# EAGLE board dr-who (EAGLE 9.6.2)
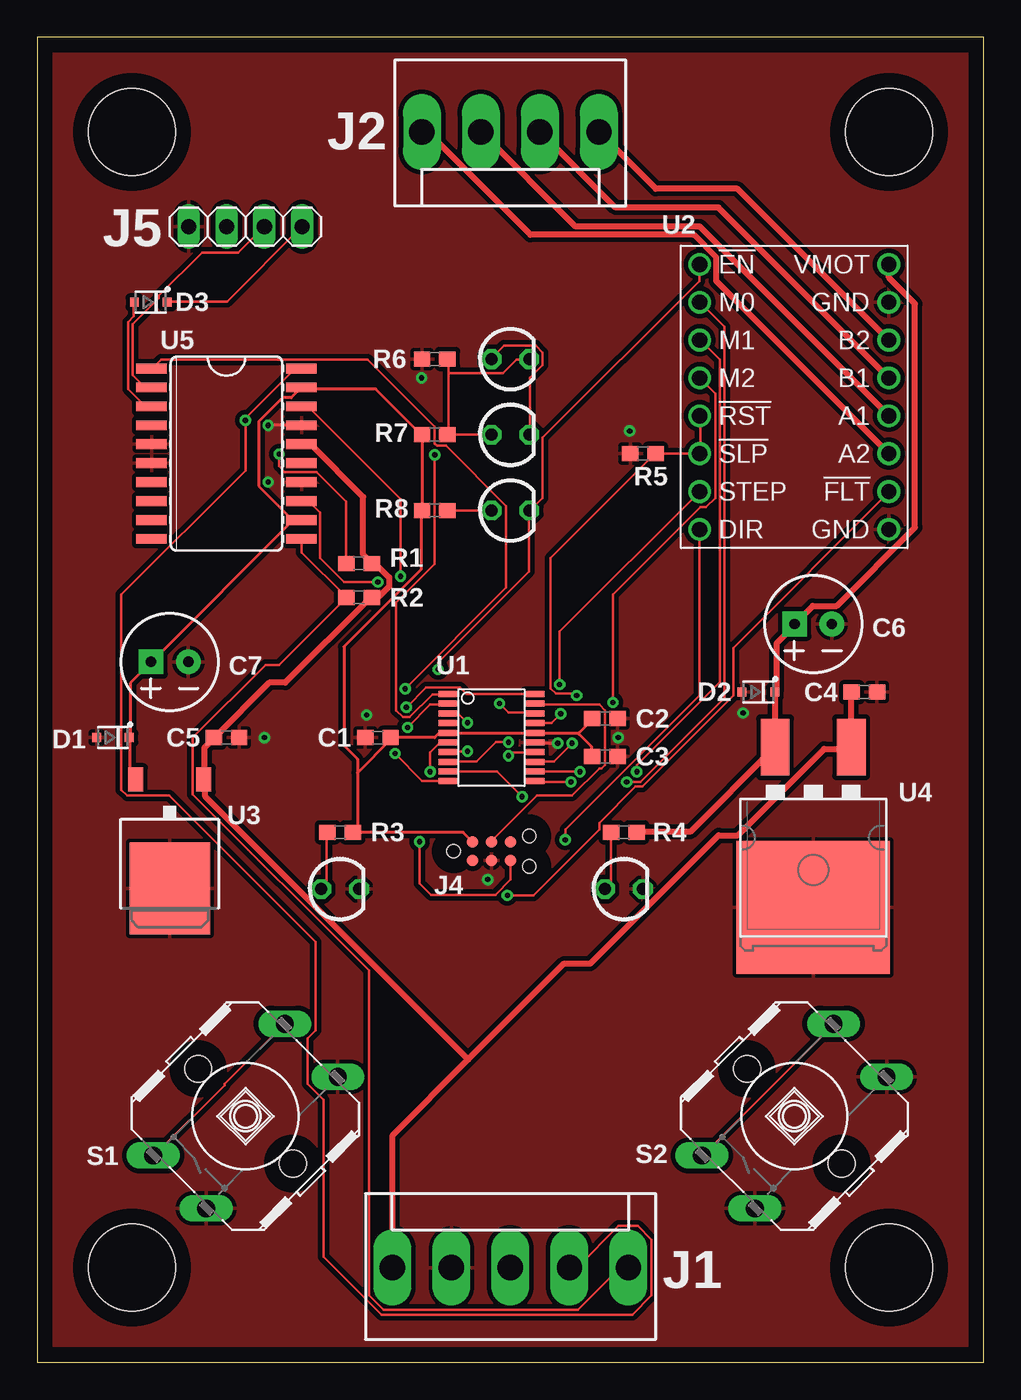
[diagram p0: board, top side]
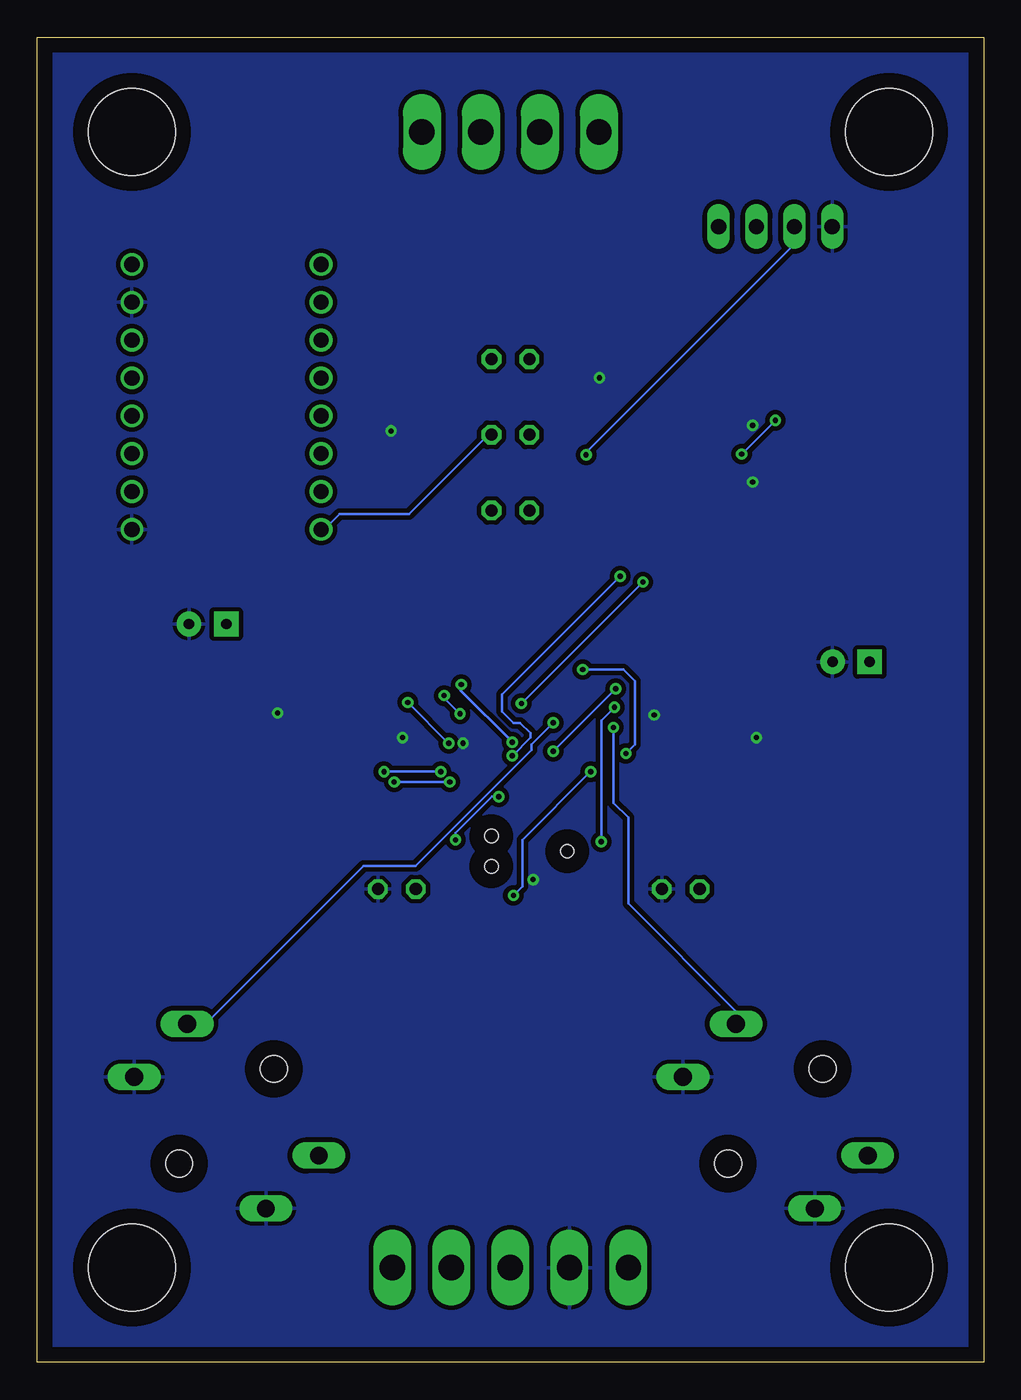
[diagram p1: board, bottom side, seen from below]

Size 63.5 x 88.9 mm. Coordinates in mm from the lower left corner, seen from the top.
Outline: 0,0 63.5,0 63.5,88.9 0,88.9 0,0
Copper layers (1*16): Top 0.035mm / dielectric 1.5mm / Bottom 0.035mm
Design rules "default *": minimum track width 6mil, minimum drill 0.35mm, track to track 6mil, track to pad 6mil, pad to pad 6mil, via to via 6mil, smd to smd 6mil, copper to edge 40mil, drill to drill 6mil, minimum pad ring 10mil, minimum via ring 8mil, stop-mask expansion 4mil, vias tented up to drill 14mil, thermal gap 10mil
Net classes: 0 default: width 0.102 mm; 1 fat: width 0.406 mm; 2 medium: width 0.203 mm
Holes 5.84 mm at 6.35,6.35 57.15,6.35 57.15,82.55 6.35,82.55

## Footprints (pad centres in the part's own frame; a part is rotated, then mirrored left to right if it is on the bottom)
0603 = smd 1.1 x 1: 1 -0.85,0; 2 0.85,0
CPOL-RADIAL-2.5MM-6.5MM = drill 0.7 pad 1.651 square: 1 1.25,0 | drill 0.7 pad 1.651: 2 -1.25,0
SOD323-R = smd 0.6 x 0.6: A 1.1,0; C -1.1,0
KK-156-5 = drill 1.7 pad 2.184 long: 1 7.92,0; 2 3.96,0; 3 0,0; 4 -3.96,0; 5 -7.92,0
KK-156-4 = drill 1.7 pad 2.184 long: 1 5.94,0; 2 1.98,0; 3 -1.98,0; 4 -5.94,0
TC2030-MCP-NL = smd 0.787 x 0.787: 1 1.27,-0.635; 2 1.27,0.635; 3 2.54,-0.635; 4 2.54,0.635; 5 3.81,-0.635; 6 3.81,0.635 | hole 0.889: 0,0; 5.08,-1.016; 5.08,1.016
1X04 = drill 1.016 long: 1 -3.81,0; 2 -1.27,0; 3 1.27,0; 4 3.81,0
LED3MM = drill 0.813 octagon: A -1.27,0; K 1.27,0
B3F/40XX = drill 1.194 long: 1 -6.198,-2.642; 2 2.642,6.198; 3 -2.642,-6.198; 4 6.198,2.642 | hole 1.803: -3.175,3.175; 3.175,-3.175
TSSOP20-I = smd 0.4 x 1.35: 1 -2.925,-2.875; 2 -2.275,-2.875; 3 -1.625,-2.875; 4 -0.975,-2.875; 5 -0.325,-2.875; 6 0.325,-2.875; 7 0.975,-2.875; 8 1.625,-2.875; 9 2.275,-2.875; 10 2.925,-2.875; 11 2.925,2.875; 12 2.275,2.875; 13 1.625,2.875; 14 0.975,2.875; 15 0.325,2.875; 16 -0.325,2.875; 17 -0.975,2.875; 18 -1.625,2.875; 19 -2.275,2.875; 20 -2.925,2.875
DRV8825 = drill 1.016: 1 -6.35,8.89; 2 -6.35,6.35; 3 -6.35,3.81; 4 -6.35,1.27; 5 -6.35,-1.27; 6 -6.35,-3.81; 7 -6.35,-6.35; 8 -6.35,-8.89; 9 6.35,-8.89; 10 6.35,-6.35; 11 6.35,-3.81; 12 6.35,-1.27; 13 6.35,1.27; 14 6.35,3.81; 15 6.35,6.35; 16 6.35,8.89
TO252 = smd 1 x 1.6: 1 -2.28,-4.8; 3 2.28,-4.8 | smd 5.4 x 6.2: 2 0,2.5
D2PAK = smd 1.93 x 3.81: 1 -2.55,-8.25; 3 2.55,-8.25 | smd 10.3 x 8.9: 2 0,2.5
SO20L = smd 0.66 x 2.032: 1 -5.715,-5.029; 2 -4.445,-5.029; 3 -3.175,-5.029; 4 -1.905,-5.029; 5 -0.635,-5.029; 6 0.635,-5.029; 7 1.905,-5.029; 8 3.175,-5.029; 9 4.445,-5.029; 10 5.715,-5.029; 11 5.715,5.029; 12 4.445,5.029; 13 3.175,5.029; 14 1.905,5.029; 15 0.635,5.029; 16 -0.635,5.029; 17 -1.905,5.029; 18 -3.175,5.029; 19 -4.445,5.029; 20 -5.715,5.029

## Placement (x,y rotation side)
C1  4.7uF  [0603]  22.86,41.91 180 top
C2  0.1uF  [0603]  38.1,43.18 0 top
C3  0.1uF  [0603]  38.1,40.64 0 top
C4  0.47uF  [0603]  55.5,44.96 0 top
C5  0.47uF  [0603]  12.7,41.91 0 top
C6  100uF  [CPOL-RADIAL-2.5MM-6.5MM]  52.07,49.53 180 top
C7  100uF  [CPOL-RADIAL-2.5MM-6.5MM]  8.89,46.99 180 top
D1  [SOD323-R]  5.08,41.91 180 top
D2  [SOD323-R]  48.39,44.96 180 top
D3  [SOD323-R]  7.62,71.12 180 top
J1  [KK-156-5]  31.75,6.35 0 top
J2  [KK-156-4]  31.75,82.55 180 top
J4  [TC2030-MCP-NL]  27.94,34.29 0 top
J5  [1X04]  13.97,76.2 0 top
LED1  3.3V  [LED3MM]  20.32,31.75 0 top
LED2  12V  [LED3MM]  39.37,31.75 0 top
LED3  D+  [LED3MM]  31.75,67.31 0 top
LED4  D-  [LED3MM]  31.75,62.23 0 top
LED5  EN  [LED3MM]  31.75,57.15 0 top
R1  10k  [0603]  21.59,53.59 0 top
R2  10k  [0603]  21.59,51.31 0 top
R3  650  [0603]  20.32,35.56 0 top
R4  5k  [0603]  39.37,35.56 0 top
R5  100k  [0603]  40.64,60.96 0 top
R6  470  [0603]  26.67,67.31 180 top
R7  470  [0603]  26.67,62.23 0 top
R8  470  [0603]  26.67,57.15 0 top
S1  MOVE  [B3F/40XX]  13.97,16.51 0 top
S2  ENTER  [B3F/40XX]  50.8,16.51 0 top
U1  STM32L011F3P6  [TSSOP20-I]  30.48,41.91 270 top
U2  2977-DRV8825  [DRV8825]  50.8,64.77 0 top
U3  LM2936DT-3.3  [TO252]  8.89,34.29 180 top
U4  LM2936D2PAK  [D2PAK]  52.07,33.02 180 top
U5  MAX333ACWP  [SO20L]  12.7,60.96 270 top

## Library data of the parts
C1 = SparkFun-Capacitors; PROD_ID: CAP-08280
C2 C3 = SparkFun-Capacitors; PROD_ID: CAP-00810
C4 C5 = SparkFun-Capacitors; PROD_ID: CAP-07884
C6 C7 = SparkFun-Capacitors; PROD_ID: CAP-08439
D1-D3 = diode-b
J1 J2 = con-molexb; MF: MOLEX; OC_FARNELL: unknown; OC_NEWARK: unknown
J4 = tag-connect
J5 = pinhead
LED1-LED5 = led-b
R1-R8 = SparkFun-Resistors; PROD_ID: RES-00824
S1 S2 = switch-omron; OC_FARNELL: unknown; OC_NEWARK: unknown
U1 = STM32L011F3P6
U2 = pololu-stepper-driver
U3 = national-semiconductor; MPN: BD433M5FP-CE2; OC_FARNELL: 1286863; OC_NEWARK: 26M0361
U4 = national-semiconductor
U5 = maxim; MF: MAXIM; MPN: MAX333ACWP+; OC_FARNELL: 9725547; OC_NEWARK: 28K3302

## Nets
12V [fat]: C6.1 D2.C R4.2 U2.16 U4.3
20V [fat]: C4.1 C5.1 J1.5 R1.2 R2.2 U3.1 U4.1 U5.16
A1 [fat]: J2.2 U2.12
A2 [fat]: J2.1 U2.11
B1 [fat]: J2.3 U2.13
B2 [fat]: J2.4 U2.14
COL2_HV: D3.A U5.3
DIR: U1.18 U5.13
DIR_HV: J1.1 R2.1 U5.11
EN: U1.14 U5.18
EN_HV: J1.2 R1.1 U5.20
GND [medium]: C1.2 C2.2 C3.2 C4.2 C5.2 C6.2 C7.2 D1.A D2.A J1.4 J4.3 J5.1 LED1.K LED2.K R5.1 R6.2 S1.3 S1.4 S2.3 S2.4 U1.15 U2.9 U2.15 U3.2 U4.2 U5.5 U5.6 U5.14 U5.17
HOME: U1.7 U5.1
LIMIT: J5.2 U1.1
N$1: D3.C J5.4
N$4: LED3.K LED4.A R6.1 R7.2
N$5: LED5.A R8.2
N$6: LED1.A R3.1
N$7: LED2.A R4.1
ROW2_HV: J5.3 U5.2
S_!EN: LED5.K U1.10 U2.1
S_!FLT: U1.6 U2.10
S_!RST: R5.2 U1.17 U2.5 U2.6
S_DIR: LED3.A LED4.K U1.9 U2.8
S_M0: U1.11 U2.2
S_M1: U1.12 U2.3
S_M2: U1.13 U2.4
S_STEP: U1.8 U2.7
SW0: S1.1 S1.2 U1.2
SW1: S2.1 S2.2 U1.3
SW_CLK: J4.5 U1.20
SW_DIO: J4.4 U1.19
VCC [medium]: C1.1 C2.1 C3.1 C7.1 D1.C J4.2 R3.2 R7.1 R8.1 U1.5 U1.16 U3.3 U5.12 U5.19

## Tracks (layer width: path | path; a pad name or v marks a point on that pad's centre or on a via)
12V
  Top 0.406: R4.2 40.23,35.59 43.81,35.59 49.38,41.15 U4.3 49.53,41.3 49.53,44.96 D2.C 49.61,45.11 49.61,48.23 50.75,49.38 C6.1 52.05,50.75 53.65,50.75 58.9,56.01 58.9,71.02 57.15,72.77 U2.16
20V
  Top 0.406: U5.16 17.75,61.57 18.36,61.57 21.87,58.06 21.87,54.18 22.33,53.72 R1.2 22.48,53.57 22.71,53.57 23.62,52.65 23.62,52.05 22.94,51.36 22.48,51.36 R2.2 22.25,51.21 16.64,45.59 15.57,45.59 11.89,41.91 C5.1 11.73,41.76 11.2,41.22 11.2,39.09 U3.1 11.28,38.94 11.28,37.95 28.92,20.31 | C4.1 54.63,44.96 54.63,41.3 U4.1 54.48,41.15 52.81,41.15 47.02,35.36 45.72,35.36 37.11,26.75 35.36,26.75 28.92,20.31 | 28.92,20.31 23.85,15.24 23.85,6.4 J1.5
A1
  Top 0.406: U2.12 44.45,76.2 36.12,76.2 J2.2
A2
  Top 0.406: U2.11 45.57,72.54 45.57,74.12 44.05,75.64 33.1,75.64 26.19,82.55 J2.1
B1
  Top 0.406: U2.13 45.72,77.47 38.81,77.47 J2.3
B2
  Top 0.406: U2.14 46.99,78.74 41.5,78.74 J2.4
COL2_HV
  Top 0.152: D3.A 6.48,71.09 6.48,70.18 6.1,69.8 6.1,65.3 7.24,64.16 7.62,64.16 U5.3
DIR  (via drill 0.35)
  Top 0.152: v31.01,44.2 31.62,43.59 33.3,43.59 U1.18 | v22.86,52.35 20.57,52.35 18.97,53.95 18.97,57 18.21,57.76 17.75,57.76 U5.13
  Bottom 0.152: 22.78,52.43 v22.86,52.35 v31.01,44.2
DIR_HV
  Top 0.152: U5.11 17.75,55.24 17.75,54.33 20.73,51.36 R2.1 20.73,51.28 16.23,46.79 15.32,46.79 10.44,41.91 10.44,38.1 22.25,26.29 22.25,4.5 23.24,3.5 36.27,3.5 39.09,6.33 39.62,6.33 J1.1
EN  (via drill 0.35)
  Top 0.152: v31.62,40.69 31.85,40.92 33.3,40.92 U1.14 | v24.38,52.73 24.38,57.91 18.21,64.08 17.75,64.08 U5.18
  Bottom 0.152: v31.62,40.69 30.4,41.91 30.4,42.22 31.09,42.9 31.55,42.9 32.31,43.66 32.31,44.81 v24.38,52.73
EN_HV  (via drill 0.35)
  Top 0.152: v16.23,60.94 16.23,60.12 16.61,59.74 18.75,59.74 20.73,57.76 20.73,53.65 R1.1 | U5.20 17.3,66.67 13.97,63.35 v13.97,63.2 13.97,59.84 5.64,51.51 5.64,38.41 6.02,38.02 8.84,38.02 18.67,28.19 18.67,22.25 18.14,21.72 18.14,18.67 19.2,17.6 19.2,7.09 23.09,3.2 39.93,3.2 41.22,4.5 41.22,8.23 40.31,9.14 39.01,9.14 36.27,6.4 35.74,6.4 J1.2
  Bottom 0.152: v16.23,60.94 v13.97,63.2
GND  (via drill 0.35)
  Top 0.203: v34.92,41.53 33.41,41.53 | U5.17 v15.49,62.87
  other vias: 15.49,59.05 38.99,41.91 25.78,66.04 15.24,41.91 22.1,43.43 47.37,43.56 39.75,62.48 30.23,32.38
  pour Top (isolate 0.305): 0,88.9 63.5,88.9 63.5,0 0,0
  pour Bottom (isolate 0.305): 0,88.9 63.5,88.9 63.5,0 0,0
HOME  (via drill 0.35)
  Top 0.152: v28.88,41 27.66,41 U1.7 | v24.69,45.19 31.47,51.97 31.47,57.45 27.43,61.49 26.82,61.49 26.67,61.65 26.67,62.79 22.17,67.28 8.31,67.28 7.7,66.67 U5.1
  Bottom 0.152: v24.69,45.19 v28.88,41
LIMIT  (via drill 0.35)
  Top 0.152: v26.67,60.88 26.67,53.57 24.08,50.98 24.08,43.74 24.54,43.28 24.99,43.28 26.52,44.81 27.58,44.81 U1.1
  Bottom 0.152: v26.67,60.88 26.67,61.04 12.72,74.98 12.72,76.2 J5.2
N$1
  Top 0.152: D3.C 8.76,71.17 12.72,71.17 17.75,76.2 J5.4
N$4
  Top 0.152: LED4.A 30.48,62.26 27.58,62.26 R7.2 27.58,62.33 27.58,66.37 | 27.58,66.37 27.58,67.28 R6.1 | 27.58,66.37 31.24,66.37 32.16,67.28 32.99,67.28 LED3.K
N$5
  Top 0.152: LED5.A R8.2
N$6
  Top 0.152: R3.1 19.43,35.51 19.43,32.16 19.05,31.77 LED1.A
N$7
  Top 0.152: R4.1 38.48,35.51 38.48,32.16 38.1,31.77 LED2.A
ROW2_HV
  Top 0.152: J5.3 13.49,74.45 11.05,74.45 8.15,71.55 8.15,71.4 6.4,69.65 6.4,66.22 7.16,65.46 7.62,65.46 U5.2
S_!EN  (via drill 0.35)
  Top 0.152: v24,40.84 25.83,39.01 27.58,39.01 U1.10 | v26.9,46.48 26.9,46.94 32.99,53.03 32.99,57.15 LED5.K 33.07,57.15 33.91,57.99 33.91,62.03 44.42,72.54 44.42,73.61 U2.1
  Bottom 0.152: v24,40.84 23.39,41.45 23.39,45.72 24.16,46.48 v26.9,46.48
S_!FLT  (via drill 0.35)
  Top 0.152: v26.36,39.62 26.36,40.92 26.98,41.53 27.58,41.53 U1.6 | v31.55,31.32 33.3,31.32 37.72,35.74 37.72,36.2 40.16,38.63 40.62,38.63 46.71,44.73 46.71,47.93 57.15,58.37 U2.10
  Bottom 0.152: v26.36,39.62 30.94,35.05 30.94,31.93 v31.55,31.32
S_!RST  (via drill 0.35)
  Top 0.152: v35.13,43.51 34.52,42.9 33.38,42.9 U1.17 | v36.2,44.73 36.07,44.86 34.8,44.86 34.44,45.21 34.44,53.95 41.45,60.96 R5.2 U2.6 44.5,60.96 44.5,63.48 U2.5
  Bottom 0.152: v35.13,43.51 36.2,44.58 v36.2,44.73
S_DIR  (via drill 0.35)
  Top 0.152: LED4.K 33.07,62.26 33.07,66.06 33.91,66.9 33.91,67.74 33.45,68.2 31.32,68.2 30.48,67.36 LED3.A | v32.54,37.95 30.86,39.62 27.66,39.62 U1.9 | v35.43,35.05 35.43,35.74 44.42,44.73 44.42,55.85 U2.8
  Bottom 0.152: v32.54,37.95 32.99,37.95 35.43,35.51 v35.43,35.05 | LED4.K 33.07,62.18 33.3,62.18 38.56,56.92 43.2,56.92 44.2,55.93 44.42,55.93 U2.8
S_M0  (via drill 0.35)
  Top 0.152: v35.81,38.94 33.38,38.94 U1.11 | v39.55,38.94 40.46,38.94 46.1,44.58 46.1,69.49 44.5,71.09 U2.2
  Bottom 0.152: v39.55,38.94 v35.81,38.94
S_M1  (via drill 0.35)
  Top 0.152: v36.42,39.62 33.38,39.62 U1.12 | v40.23,39.62 40.23,40.08 45.8,45.64 45.8,67.28 44.5,68.58 U2.3
  Bottom 0.152: v40.23,39.62 v36.42,39.62
S_M2  (via drill 0.35)
  Top 0.152: v35.89,41.53 34.67,40.31 33.38,40.31 U1.13 | v38.63,44.27 38.63,51.51 44.5,57.38 44.88,57.38 45.49,57.99 45.49,65 U2.4
  Bottom 0.152: v38.63,44.27 v35.89,41.53
S_STEP  (via drill 0.35)
  Top 0.152: U1.8 27.66,40.31 29.49,40.31 30.78,41.6 v31.62,41.6 | 44.42,58.37 U2.7 35.05,49.02 v35.05,45.47
  Bottom 0.203: v31.62,41.6 35.05,45.03 v35.05,45.47
SW0  (via drill 0.35)
  Top 0.152: v24.84,42.6 26.36,44.12 27.58,44.12 U1.2 | S1.2 12.57,18.67 12.57,18.59 7.85,13.87 S1.1
  Bottom 0.152: S1.2 16.61,23.55 23.84,30.77 23.84,36.54 24.84,37.54 v24.84,42.6
SW1  (via drill 0.35)
  Top 0.152: v28.88,42.9 28.27,43.51 27.66,43.51 U1.3 | S2.1 44.65,13.87 53.49,22.71 S2.2
  Bottom 0.152: v28.88,42.9 30.33,41.45 30.33,41.07 38.1,33.3 41.6,33.3 52.2,22.71 S2.2
SW_CLK  (via drill 0.35)
  Top 0.152: J4.5 31.75,32.38 30.73,31.37 26.42,31.37 25.65,32.13 v25.65,34.92 | U1.20 28.8,44.84 28.38,45.26 26.09,45.26 v24.77,43.94
  Bottom 0.152: v25.65,34.92 25.65,43.05 v24.77,43.94
SW_DIO
  Top 0.152: J4.4 30.48,34.98 33.53,38.02 35.89,38.02 37.72,39.85 37.87,39.85 38.1,40.08 38.1,43.74 37.72,44.12 33.38,44.12 U1.19
VCC
  Top 0.203: 36.35,42.23 U1.16 U1.5 27.51,42.22 26.98,42.22 26.67,41.91 C1.1 | 36.35,42.23 36.37,42.23 37.26,43.13 37.26,43.2 C2.1 | C3.1 37.19,40.69 37.19,41.3 36.35,42.14 36.35,42.23 | U3.3 6.55,39.09 6.25,39.4 6.25,41.91 D1.C 6.25,41.99 6.25,45.57 7.62,46.94 C7.1 7.7,47.02 17.14,56.46 U5.12 17.68,56.54 17.22,56.54 17.14,56.52 14.86,58.79 14.86,63.13 16.45,64.72 17.04,64.72 U5.19 17.75,65.3 22.71,65.3 25.76,62.26 R7.1 25.83,62.18 25.83,57.15 R8.1 25.76,57.07 25.76,53.19 20.57,48.01 20.57,41.38 21.49,40.46 21.49,39.55 | 21.49,35.89 21.18,35.59 R3.2 | 21.49,39.55 21.49,35.97 R3.2 | 23.7,41.83 C1.1 | J4.2 28.57,35.56 R3.2 | C1.1 23.71,41.77 21.49,39.55